# Altium PCB PCB-HC15C_REV1.PcbDoc (part 2 of 2)
Units mil, origin at the board's own origin, x right, y up, seen from the top; angles counter-clockwise.
Board outline 5600 x 4750 mil, 4 copper layers (Top Layer, InternalPlane1, InternalPlane2, Bottom Layer); 217 components, 162 nets, 705 pads, 241 vias.
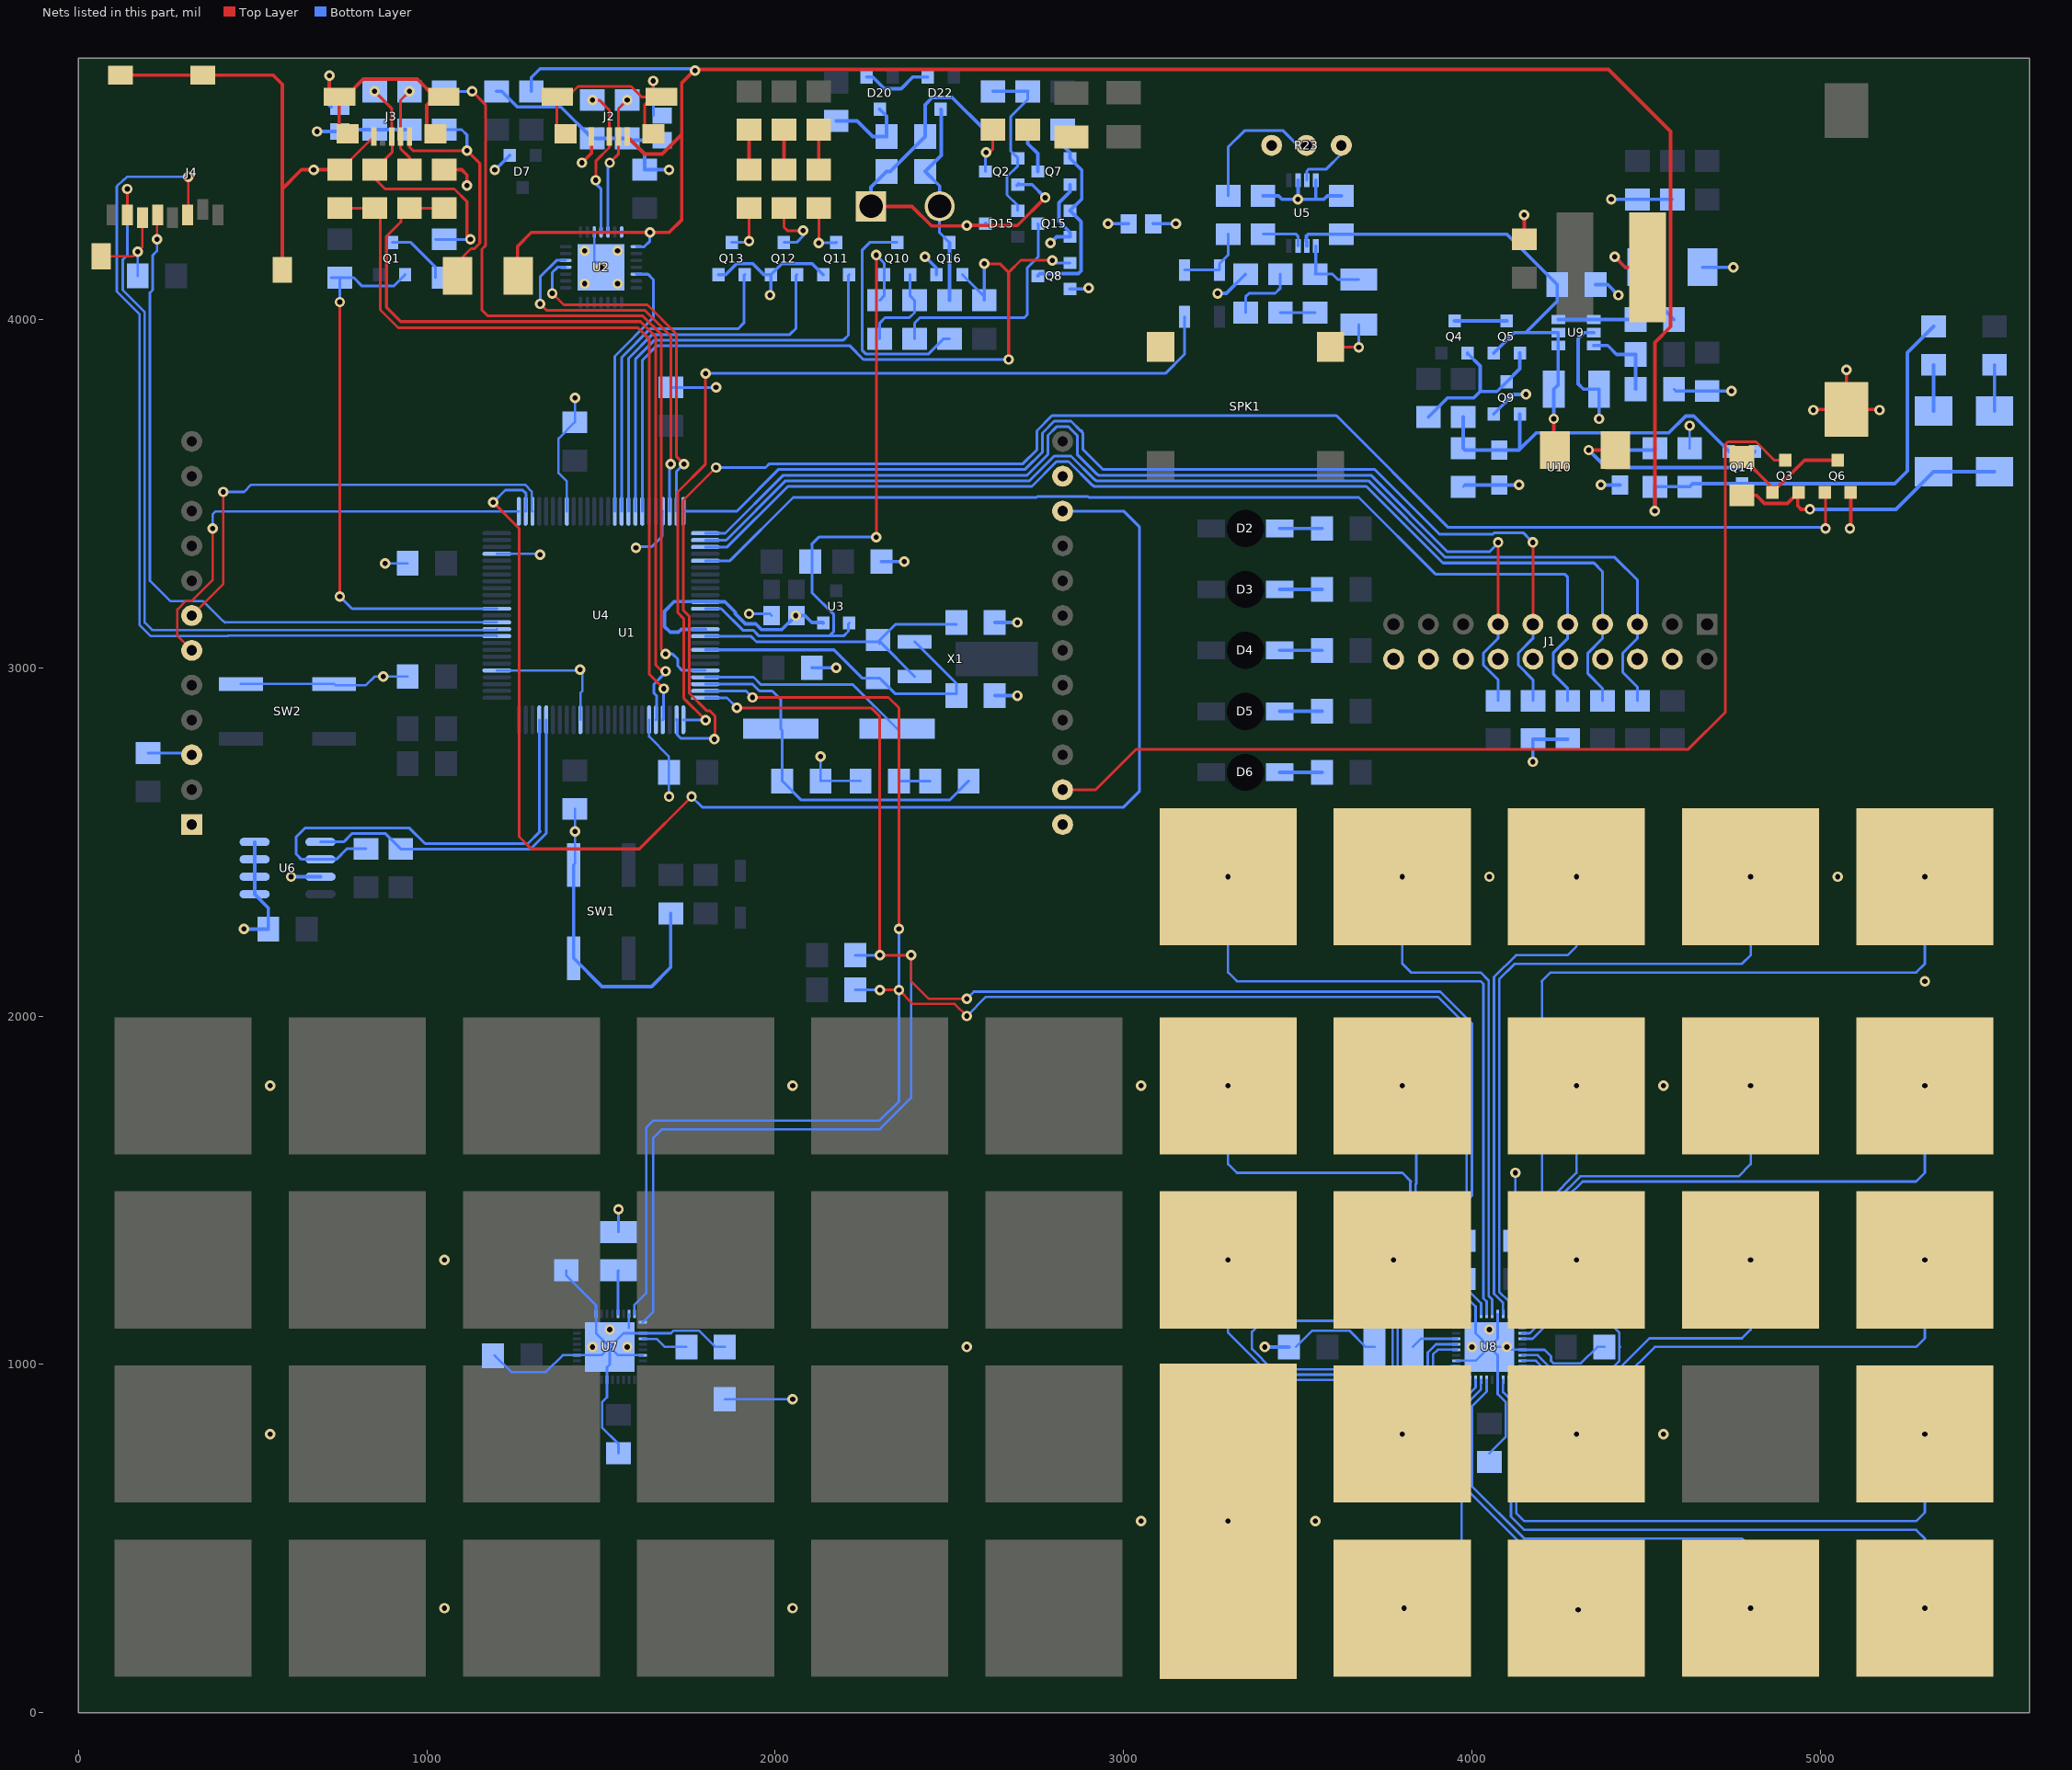
[diagram p4: the nets of this part, all layers, seen from the top]

## Via types
v1: diameter 30, hole 15, Top Layer to Bottom Layer, 230 vias
v2: diameter 30, hole 15, Top Layer to Bottom Layer, tented top, 11 vias

## Nets (pads, with @x,y where several pads share a name; then routed paths per layer and width w, separated by ;. In a path a pad name is that pad's centre, name@x,y a point inside that pad or via, vN(x,y) a via of type N, cw(c..) or ccw(c..) an arc to the next point about the centre after c; other vN are vias at no path point) (continued)
BCAP1: CS35.1 U8.2 | length 1809.5
  Bottom Layer w7: U8.2@4105.12,955.51 4105.12,925.62 4126.93,903.8 4126.93,573.07 4150,550 5275,550 5300,575 v1(5300,800)
BCAP2: CS47.1 U8.3 | length 1816
  Bottom Layer w7: U8.3@4089.37,955.51 4089.37,920.15 4111.93,897.59 4111.93,563.07 4150,525 5275,525 5300,500 v1(5300,300)
BCAP3: CS44.1 U8.8 | length 755.3
  Bottom Layer w7: v1(3805,300) 3830,300 3970,440 3970,893.15 4010.32,933.47 4010.32,955.2 U8.8@4010.63,955.51
BCAP4: CS32.1 U8.9 | length 310
  Bottom Layer w7: v1(3800,800) 3800,870.35 3825,895.35 3950.98,895.35 3994.57,938.94 3994.57,955.2 U8.9@3994.88,955.51
BCAP5: CS43.1 U8.10 | length 1074.9
  Bottom Layer w7: v1(3300,550) 3300,875 3380.51,955.51 3649.82,955.51 3694.98,910.35 3897.44,910.35 3942.61,955.51 U8.10@3979.13,955.51
BCAP6: CS19.1 U8.11 | length 955.2
  Bottom Layer w7: v1(3300,1300) 3300,1091.31 3420.8,970.51 3656.03,970.51 3701.2,925.35 3891.23,925.35 3945.01,979.13 U8.11@3955.51,979.13
BCAP7: CS20.1 U8.12 | length 1267.5
  Bottom Layer w7: v1(3775,1300) 3750,1275 3750,1150 3725,1125 3400,1125 3368.5,1093.5 3368.5,1044.02 3427.01,985.51 3662.25,985.51 3707.41,940.35 3885.02,940.35 3918.11,973.45 3918.11,973.75 3939.25,994.88 U8.12@3955.51,994.88
BCAP8: CS31.1 U8.28 | length 1451.8
  Bottom Layer w7: U8.28@4089.37,1144.49 4089.37,1176.11 4063.07,1202.41 4063.07,2111.93 4126.13,2175 4275,2175 4300,2200 v1(4300,2400)
BCAP9: CS36.1 U8.29 | length 1948.1
  Bottom Layer w7: U8.29@4105.12,1144.49 4105.12,1181.57 4078.07,1208.62 4078.07,2105.72 4122.35,2150 4775,2150 4800,2175 v1(4800,2400)
BCAP10: CS48.1 U8.31 | length 2374.1
  Bottom Layer w7: U8.31@4144.49,1120.87 4144.49,1181.18 4201.5,1238.19 4201.5,2098.5 4200,2100 4225,2125 5275,2125 5300,2150 v1(5300,2400)
BCAP11: CS9.1 U8.32 | length 768.8
  Bottom Layer w7: U8.32@4144.49,1105.12 4144.8,1105.43 4161.06,1105.43 4225,1169.37 4225,1475 4300,1550 v1(4300,1800)
BCAP12: CS10.1 U8.33 | length 1260.7
  Bottom Layer w7: U8.33@4144.49,1089.37 4166.22,1089.37 4250,1173.15 4250,1478.79 4311.21,1540 4765,1540 4800,1575 v1(4800,1800)
BCAP13: CS11.1 U8.34 | length 1783
  Bottom Layer w7: U8.34@4144.49,1073.62 4173.62,1073.62 4273.5,1173.5 4273.5,1481.07 4317.43,1525 5275,1525 5300,1550 v1(5300,1800)
BCAP14: CS23.1 U8.39 | length 1444.2
  Bottom Layer w7: U8.39@4144.49,994.88 4178.17,994.88 4214.98,958.07 4433.07,958.07 4525,1050 5275,1050 5300,1075 v1(5300,1300)
BCAP15: CS33.1 U8.40 | length 302.9
  Bottom Layer w7: U8.40@4144.49,979.13 4172.7,979.13 4208.77,943.07 4281.93,943.07 4300,925 v1(4300,800)
BCAP16: CS46.1 U8.6 | length 1370.4
  Bottom Layer w7: U8.6@4042.13,955.51 4042.13,921.58 4000,879.46 4000,650 4150,500 4775,500 4800,475 v1(4800,300)
BCAP17: CS45.1 U8.7 | length 810.2
  Bottom Layer w7: U8.7@4026.38,955.51 4026.07,955.2 4026.07,928.01 3985,886.94 3985,640 4305,320 v1(4305,295)
BCAP18: CS7.1 U8.15 | length 1576.1
  Bottom Layer w7: v1(3300,1800) 3300,1575 3325,1550 3800,1550 3825,1525 3823.07,1523.07 3823.07,1198.07 3772.12,1147.12 3772.12,985.87 3787.65,970.35 3872.59,970.35 3888.11,985.87 3888.11,1028.3 3901.94,1042.13 U8.15@3955.51,1042.13
BCAP19: CS8.1 U8.16 | length 1072.5
  Bottom Layer w7: v1(3800,1800) 3840,1760 3840,1518.79 3838.07,1516.85 3838.07,1188.07 3787.12,1137.12 3787.12,992.09 3793.86,985.35 3866.38,985.35 3873.11,992.09 3873.11,1034.51 3896.47,1057.87 U8.16@3955.51,1057.87
BCAP20: CS12.1 U8.25 | length 1973
  Bottom Layer w7: v1(3300,2400) 3300,2125 3325,2100 4025,2100 4033.07,2091.93 4033.07,1189.98 4042.13,1180.92 U8.25@4042.13,1144.49
BCAP21: CS24.1 U8.26 | length 1479.5
  Bottom Layer w7: v1(3800,2400) 3800,2150 3825,2125 4025,2125 4048.07,2101.93 4048.07,1196.2 4057.87,1186.39 U8.26@4057.87,1144.49
BCAP22: CS21.1 U8.37 | length 646.3
  Bottom Layer w7: U8.37@4144.49,1026.38 4189.1,1026.38 4227.41,988.07 4401.38,988.07 4423.11,1009.8 4423.11,1048.11 4425,1050 4423.11,1051.89 4423.11,1090.2 4300,1213.31 v1(4300,1300)
BCAP23: CS22.1 U8.38 | length 923.6
  Bottom Layer w7: U8.38@4144.49,1010.63 4183.63,1010.63 4221.2,973.07 4407.59,973.07 4509.52,1075 4775,1075 4800,1100 v1(4800,1300)
GND: BAT1.2 C1.2 C2.2 C3.2 C4.2 C5.2 C6.2 C7.2 C14.2 C15.2 C16.2 C17.2 C18.2 C19.2 C20.2 C21.2 C22.2 C23.2 C24.2 C25.2 C26.2 C27.2 C28.2 C29.2 C30.2 C31.2 C32.2 C33.2 C34.2 C35.2 C36.2 C38.2 C39.2 C40.2 C41.1 C42.2 C43.2 C46.2 D7.1 D8.1 D9.1 D11.1 D12.1 D18.1 FB1.1 FB3.1 FB4.1 FB5.1 J1.4 J1.6 J1.8 J1.10 J1.12 J1.14 J1.16 J1.18 J1.20 J2.5 J3.5 J4.6 J4.9 J4.10 J4.11 J4.12 Q6.2 Q9.2 R4.1 R6.1 R13.1 R39.1 R46.1 SW1.1 SW1.4 SW2.1 SW2.4 U1.1 U1.14 U1.24 U2.3 U2.29 U4.31 U4.41 U4.55 U4.72 U4.83 U4.97 U6.1 U6.2 U6.3 U6.4 U6.7 U7.4 U7.13 U7.19 U7.23 U7.27 U7.36 U7.41 U8.4 U8.13 U8.23 U8.27 U8.36 U8.41 U9.2 U10.2 U10.3 | length 12352.1
  Top Layer w7: J4.9@65.35,4181.89 156.89,4181.89 v1(170,4195) 183.46,4208.46 J4.6@183.46,4292.13 ; C2.2@750,4430.12 752.76,4430.12 J3.5@847.64,4525
  Top Layer w10: J4.10@120.47,4701.57 J4.11@356.69,4701.57 558.43,4701.57 585.04,4674.96 585.04,4375 ; J4.12@585.04,4142.52 585.04,4375 ; v1(675,4430) 640.04,4430 585.04,4375 ; v1@675,4430.12 C2.2@750,4430.12 ; C1.2@1050,4430.12 1099.88,4430.12 1115,4415 v1(1115,4385) ; v1(1445,4450) 1472.64,4477.64 J2.5@1472.64,4525 ; C39.2@4150,4230.12 v1(4150,4300) ; v1(4980,3740) 4981.73,3741.73 BAT1.2@5075,3741.73 ; v1(5075,3855) BAT1.2@5075,3741.73 ; v1(5085,3400) 5087.4,3402.4 Q6.2@5087.4,3503.74 ; v1(5170,3740) 5168.27,3741.73 BAT1.2@5075,3741.73
  Bottom Layer w7: C22.2@169.88,4125 169.88,4194.88 v1(170,4195) ; SW2.4@466.14,2953.74 SW2.1@733.86,2953.74 737.6,2950 825,2950 850,2975 C18.2@944.88,2975 ; v1(880,3300) C19.2@944.88,3300 ; C29.2@1194.88,1025 1241.82,978.07 1341.38,978.07 1389.69,1026.38 U7.4@1430.51,1026.38 1501.38,1026.38 U7.41@1525,1050 ; v1(1195,4430) 1200,4435 v1@1201.34,4435 ; U4.55@1200.79,2992.52 1437.52,2992.52 v1(1440,2995) 1446.5,2988.5 1446.5,2934.02 1440.94,2928.47 U4.41@1440.94,2850.79 ; U4.72@1200.79,3327.17 1322.83,3327.17 v1(1325,3325) ; C32.2@1400,1269.88 1400,1255.33 1485.32,1170.01 1485.32,1144.8 U7.13@1485.63,1144.49 1485.63,1089.37 U7.41@1525,1050 ; U4.83@1401.57,3449.21 1401.57,3535.12 1378.07,3558.62 1378.07,3658.18 C20.2@1425,3705.12 v1(1425,3775) ; SW1.1@1421.26,2433.86 1425,2437.6 C17.2@1425,2594.88 ; U2.3@1480.31,4251.38 1480.31,4169.69 v2(1500,4150) ; C30.2@1550,744.88 1550,771.93 1503.07,818.86 1503.07,891.38 1517.13,905.44 U7.36@1517.13,955.51 1517.13,992.13 1525,1000 U7.41@1525,1050 ; C27.2@1550,1380.12 v1(1550,1445) ; U7.41@1580.12,1105.12 U7.19@1580.12,1144.49 ; D8.1@1580.12,4519.88 D8.1@1575,4519.88 1580.31,4514.57 D8.1@1585.43,4514.57 ; U7.27@1619.49,1026.38 1548.62,1026.38 U7.41@1525,1050 ; U4.31@1637.8,2850.79 1637.8,2802.2 1694.88,2745.12 C16.2@1694.88,2700 1694.88,2640.12 1695,2640 v1(1695,2630) ; v1@1689.88,4430.12 1690,4430 v1(1695,4430) ; C31.2@1855.12,900 v1(2050,900) ; C25.2@1855.12,1050 1828.07,1050 1781.14,1096.93 1708.62,1096.93 1701.06,1089.37 U7.23@1619.49,1089.37 1564.37,1089.37 U7.41@1525,1050 ; v1(1925,3155) 1984.57,3155 FB3.1@1989.57,3150 ; v1(2130,2745) 2130,2675.12 C7.2@2130.12,2675 C6.2@2244.88,2675 ; v1(2695,2920) v1@2700,2920 ; C36.2@3494.88,1050 3541.82,1096.93 3648.11,1096.93 3695.05,1050 C28.2@3719.88,1050 ; U8.13@3955.51,1010.63 4010.63,1010.63 U8.41@4050,1050 ; C26.2@3975,1355.12 3970.12,1355.12 3928.07,1313.07 3928.07,1208.62 3934.8,1201.89 3974.96,1201.89 4010.63,1166.22 U8.23@4010.63,1144.49 4010.63,1089.37 U8.41@4050,1050 ; C41.1@3975,3519.88 C41.1@3980.12,3525 ; C33.2@4050,744.88 4096.93,791.82 4096.93,891.38 4073.62,914.69 U8.4@4073.62,955.51 4073.62,1026.38 U8.41@4050,1050 ; U8.27@4073.62,1144.49 4073.62,1073.62 U8.41@4050,1050 ; C35.2@4125,1355.12 v1(4125,1550) ; C34.2@4380.12,1050 4359.81,1050 4312.88,1003.07 4233.62,1003.07 4226.89,1009.8 4226.89,1023.11 4208.18,1041.82 4144.8,1041.82 U8.36@4144.49,1042.13 4107.87,1042.13 v2(4100,1050) U8.41@4050,1050 ; R46.1@4580.12,3800 R46.1@4585.24,3794.88 ; C46.2@4625,3630.12 v1(4625,3695)
  Bottom Layer w8: v1(1600,3345) 1603,3348 1645.63,3348 1675.39,3377.76 1675.39,3447.43 U4.97@1677.17,3449.21 ; C21.2@1700,3805.12 1829.88,3805.12 v1(1830,3805)
  Bottom Layer w10: v1(475,2250) C23.2@544.88,2250 544.88,2310.63 U6.1@505.51,2350 U6.4@505.51,2500 ; v1(610,2400) U6.7@694.49,2400 ; v1(685,4540) 685.43,4539.57 FB4.1@750,4539.57 755.31,4544.88 D11.1@950,4544.88 ; R13.1@1200,4655.12 1214.69,4655.12 1259.18,4610.62 1384.26,4610.62 D9.1@1475,4519.88 D8.1@1575,4519.88 ; v1@1201.34,4435 D7.1@1237.6,4471.26 ; SW1.1@1421.26,2433.86 SW1.4@1421.26,2166.14 1502.4,2085 1645,2085 1700,2140 C3.2@1700,2294.88 ; FB1.1@1675,4514.57 1585.43,4514.57 1625,4475 C24.2@1625,4430.12 v1@1689.88,4430.12 ; C15.2@2105.12,3000 v1(2175,3000) ; C14.2@2305.12,3305 v1(2370,3305) ; C5.2@2630.12,2920 v1@2700,2920 ; C4.2@2630.12,3130 v1(2695,3130) ; FB5.1@3085.43,4275 v1(3150,4275) ; v1(3405,1050) C36.2@3474.88,1050 ; C41.1@3980.12,3525 U10.3@4078.54,3525 v1@4140,3525 ; Q9.2@4062.6,3728.74 4118.86,3785 v1(4155,3785) ; v1(4175,2730) R6.1@4175,2794.88 R4.1@4275,2794.88 ; U9.2@4350,3962.6 4322.6,3962.6 4305,3945 4305,3815 4320,3800 C43.2@4364.96,3800 4364.96,3720.04 4365,3720 v1(4365,3715) ; C42.2@4355.12,4100 4390,4100 v1(4420,4070) ; v1(4370,3525) U10.2@4425,3525 ; v1(4400,4345) 4400.12,4344.88 C40.2@4475,4344.88 R39.1@4575,4344.88 ; R46.1@4585.24,3794.88 C38.2@4675,3794.88 4744.88,3794.88 v1(4745,3795) ; D18.1@4662.01,4150 v1(4750,4150)
  other v1: 1050,300 2050,300 3050,550 3550,550 550,800 4550,800 2550,1050 1050,1300 550,1800 2050,1800 3050,1800 4550,1800 5300,2100 4050,2400 5050,2400 1425,2530 875,2975 4135,3525
  other v2: 1475,1050 1575,1050 4000,1050 1525,1100 4050,1100 1452.76,4102.76 1547.24,4102.76 1452.76,4197.24 1547.24,4197.24
GNDA: C8.1 C12.2 C44.2 D21.1 FB3.2 FB5.2 Q7.2 Q8.2 Q11.2 Q12.2 Q13.2 Q15.2 Q16.2 R23.1 R28.1 SPK1.2 U3.2 U4.11 U4.15 U5.2 U5.4 | length 1981.1
  Top Layer w10: D21.1@2849.02,4525 D21.1@2850,4524.02
  Bottom Layer w10: U4.15@1799.21,3110.63 1730.23,3110.63 1721.6,3102 1698.4,3102 1682,3118.4 1682,3162 1710,3190 1798.58,3190 U4.11@1799.21,3189.37 1855.58,3189.37 1885,3159.95 1885,3155.4 1914.46,3125.94 1944.06,3125.94 1960.56,3109.44 2018.57,3109.44 v1(2059.13,3150) ; Q13.2@1837.6,4128.74 1857.6,4128.74 1889.3,4160.44 1935.5,4160.44 1967.2,4128.74 Q12.2@1987.6,4128.74 ; v1(1985,4070) 1985,4080 1987.6,4082.6 Q12.2@1987.6,4128.74 ; FB3.2@2060.43,3150 v1(2059.13,3150) ; U3.2@2137.6,3128.74 2136.34,3130 2105,3130 2085,3150 v1(2059.13,3150) ; Q11.2@2137.6,4128.74 2105.9,4160.44 2019.3,4160.44 Q12.2@1987.6,4128.74 ; v1(2430,4180) 2462.6,4147.4 Q16.2@2462.6,4128.74 ; v1(2790,4220) 2807.6,4237.6 Q15.2@2846.26,4237.6 2846.26,4249.98 2814.56,4281.69 2814.56,4335.5 2846.26,4367.2 Q7.2@2846.26,4387.6 ; Q8.2@2846.26,4087.6 2887.6,4087.6 2890,4090 v1(2900,4090) ; v1(2955,4275) 2965,4275 FB5.2@3014.57,4275 ; v1(3270,4075) 3294.88,4075 R28.1@3350,4130.12 ; C12.2@3400,4355.12 3400.12,4355 3445,4355 3455,4345 v1(3500,4345) ; U5.2@3500.59,4400 3500.59,4345.59 v1(3500,4345) ; U5.4@3551.77,4400 3551.77,4346.77 3550,4345 ; C8.1@3625,4355.12 3585.12,4355.12 3575,4345 3550,4345 ; v1(3500,4345) 3550,4345
MISO0: J4.7 U4.61 | length 2372.2
  Top Layer w7: v1(140,4375) 140,4300.16 J4.7@140.16,4300
  Bottom Layer w7: v1(140,4375) 140,4185.05 126.89,4171.93 126.89,4084.8 190,4021.69 190,3130 211.5,3108.5 1198.66,3108.5 U4.61@1200.79,3110.63
MISO1: U1.15 U4.77 | length 4045.7
  Top Layer w8: v1(1190,3475) 1265,3400 1265,2515 1300,2480 1610,2480 v1(1760,2630)
  Bottom Layer w7: U4.77@1281.19,3451.49 U4.77@1283.46,3449.21
  Bottom Layer w8: v1(1190,3475) 1225,3510 1275,3510 1285,3500 1285,3450.75 U4.77@1283.46,3449.21 ; v1(1760,2630) 1790,2600 3000,2600 3045,2645 3045,3405 3000,3450 U1.15@2825,3450
MOSI0: J4.3 U4.60 | length 2653.8
  Top Layer w7: J4.3@313.39,4300 315,4301.61 v1(315,4410)
  Bottom Layer w7: v1(315,4410) 140,4410 131.5,4401.5 129.02,4401.5 110,4382.48 110,4080.48 175,4015.48 175,3123.79 207.84,3090.94 307.25,3090.94 307.81,3091.5 354.44,3091.5 355,3090.94 429.02,3090.94 430.58,3092.5 1199.23,3092.5 U4.60@1200.79,3090.94
MOSI1: U1.6 U4.76 | length 1342.6
  Top Layer w7: U1.6@325,3050 283.5,3091.5 283.5,3167.19 307.81,3191.5 325.19,3191.5 385,3251.31 v1(385,3400)
  Bottom Layer w7: v1(385,3400) 385,3440 394.21,3449.21 1178.31,3449.21 1179.02,3448.5 1263.07,3448.5 U4.76@1263.78,3449.21
NetC4_1: C4.1 R21.1 U4.16 X1.1 | length 894.5
  Bottom Layer w8: U4.16@1799.21,3090.94 1929.56,3090.94 1946.06,3074.44 2295.44,3074.44 R21.1@2300,3069.88 ; X1.1@2400,2975 2300,3075 2300,3080.12 2344.88,3125 C4.1@2519.88,3125
NetC5_1: C5.1 R21.2 U4.18 X1.2 | length 972.8
  Bottom Layer w8: U4.18@1799.21,3051.57 2168.43,3051.57 2250,2970 2299.88,2970 2300,2969.88 2344.88,2925 2519.88,2925 2519.88,2955.12 X1.2@2400,3075
NetC6_1: C6.1 R22.1 U4.22 X2.1 | length 853.9
  Bottom Layer w8: U4.22@1799.21,2972.83 1937.98,2972.83 1959.24,2951.57 2223.43,2951.57 X2.1@2350,2825 2355.12,2819.88 C6.1@2355.12,2675 R22.1@2444.88,2675
NetC7_1: C7.1 R22.2 U4.23 X2.2 | length 1051.5
  Bottom Layer w8: U4.23@1799.21,2953.15 1935.03,2953.15 1954.62,2933.57 1991.43,2933.57 2015.35,2909.65 X2.2@2015.35,2825 2019.88,2820.47 C7.1@2019.88,2675 2074.88,2620 2500.12,2620 R22.2@2555.12,2675
NetC9_1: C9.1 D13.2 D14.2 | length 213.3
  Bottom Layer w8: D13.2@3175,4141.93 D14.2@3275,4141.93 3275,4160 3300,4185 C9.1@3300,4244.88
NetC9_2: C9.2 R23.2 | length 506.9
  Bottom Layer w8: C9.2@3300,4355.12 3300,4495 3347,4542 3458,4542 ; 3458,4542 3525,4475 3512.5,4487.5 3458,4542
NetC10_1: C10.1 SPK1.1 | length 146.5
  Top Layer w8: SPK1.1@3594.09,3921.26 3673.74,3921.26 v1(3675,3920)
  Bottom Layer w8: v1(3675,3920) C10.1@3675,3985.04
NetC10_2: C10.2 C11.1 U5.5 | length 212.9
  Bottom Layer w8: U5.5@3551.77,4211.02 3551.77,4131.89 C11.1@3550,4130.12 3599.88,4130.12 3615,4115 C10.2@3675,4114.96 C10.2@3675,4114.96
NetC11_2: C11.2 C13.1 | length 100
  Bottom Layer w8: C13.1@3450,4019.88 C11.2@3550,4019.88
NetC12_1: C12.1 U5.7 | length 131.3
  Bottom Layer w8: C12.1@3400,4244.88 3494.88,4244.88 3495,4245 3500.59,4239.41 U5.7@3500.59,4211.02
NetC13_2: C13.2 R28.2 | length 195.6
  Bottom Layer w8: R28.2@3350,4019.88 3350,4065 3360,4075 3435,4075 3450,4090 C13.2@3450,4130.12
NetC25_1: C25.1 U7.24 | length 135.2
  Bottom Layer w7: U7.24@1619.49,1073.62 1619.8,1073.31 1659.59,1073.31 1682.9,1050 C25.1@1744.88,1050
NetC26_1: C26.1 U8.24 | length 121.7
  Bottom Layer w7: C26.1@3975,1244.88 3975,1226.84 4026.38,1175.46 U8.24@4026.38,1144.49
NetC27_1: C27.1 U7.17 | length 126
  Bottom Layer w7: U7.17@1548.62,1144.49 1548.62,1268.5 C27.1@1550,1269.88
NetC28_1: C28.1 U8.17 | length 135.2
  Bottom Layer w7: C28.1@3830.12,1050 3853.74,1073.62 U8.17@3955.51,1073.62
NetC37_1: C37.1 U9.1 U9.6 | length 222.2
  Bottom Layer w10: U9.6@4247.64,4000 U9.1@4350,4000 C37.1@4469.88,4000
NetC37_2: C37.2 D18.2 L1.1 | length 385.3
  Top Layer w10: v1(4410,4180) 4440,4150 L1.1@4504.33,4150
  Bottom Layer w10: v1(4410,4180) 4440,4150 D18.2@4487.99,4150 4487.99,4092.13 C37.2@4580.12,4000
NetC41_2: C41.2 Q9.1 Q14.1 R43.1 U10.4 | length 1039
  Bottom Layer w10: R43.1@3975,3719.88 C41.2@3975,3630.12 3980.12,3625 U10.4@4078.54,3625 4135,3625 4137.4,3627.4 ; Q9.1@4137.4,3728.74 4137.4,3627.4 ; Q14.1@4737.6,3621.26 4737.6,3622 4636.6,3723 4613.4,3723 4565.02,3674.61 4184.61,3674.61 4137.4,3627.4
NetC45_1: C45.1 D15.3 J5.1 Q2.2 R34.1 R41.1 | length 1319.6
  Top Layer w10: J5.1@2275,4325 2392.22,4325 2448.53,4268.69 2548.69,4268.69 v1(2550,4270) 2695,4270 v1(2775,4350)
  Bottom Layer w10: J5.1@2275,4325 2275,4380.12 C45.1@2319.88,4425 2330.12,4425 R41.1@2430.12,4525 2430.12,4616.49 2451.07,4637.44 2507.72,4637.44 2600.28,4544.88 R34.1@2625,4544.88 ; v1(2550,4270) 2598.74,4270 D15.3@2603.74,4275 D15.3@2605,4276.26 ; Q2.2@2693.66,4385 Q2.2@2696.26,4387.6 ; Q2.2@2698.66,4390 Q2.2@2696.26,4387.6 ; v1(2775,4350) 2737.4,4387.6 Q2.2@2696.26,4387.6
NetC45_2: C45.2 D22.3 J5.2 Q16.3 R50.1 | length 597.5
  Bottom Layer w8: J5.2@2471.85,4325 2471.85,4249.41 Q16.3@2500,4221.26
  Bottom Layer w10: J5.2@2471.85,4325 2471.85,4383.27 C45.2@2430.12,4425 2476.61,4471.5 2476.61,4602.13 D22.3@2475,4603.74 ; R50.1@2500,4055.12 Q16.3@2500,4221.26
NetD1_1: D1.1 J3.1 R17.2 | length 723
  Top Layer w8: J3.1@950,4525 950,4495 960,4485 v1(1115,4485) 1152,4448 1152,4218.82 1136.18,4203 1126.18,4203 1095,4171.82 1095,4132.01 D1.1@1087.99,4125
  Bottom Layer w8: R17.2@1050,4544.88 1100.12,4544.88 1115,4530 v1(1115,4485)
NetD2_1: D2.1 R7.1 | length 121.5
  Bottom Layer w10: D2.1@3448.43,3400 R7.1@3569.88,3400
NetD3_1: D3.1 R8.1 | length 121.5
  Bottom Layer w10: D3.1@3448.43,3225 R8.1@3569.88,3225
NetD4_1: D4.1 R9.1 | length 121.5
  Bottom Layer w10: D4.1@3448.43,3050 R9.1@3569.88,3050
NetD5_1: D5.1 R10.1 | length 121.5
  Bottom Layer w10: D5.1@3448.43,2875 R10.1@3569.88,2875
NetD6_1: D6.1 R11.1 | length 121.5
  Bottom Layer w10: D6.1@3448.43,2700 R11.1@3569.88,2700
NetD11_2: D11.2 J3.2 R18.2 | length 246.1
  Top Layer w8: R18.2@950,4430.12 950,4465 924.41,4490.59 J3.2@924.41,4525 924.41,4629.41 v1(950,4655)
NetD12_2: D12.2 J3.3 R16.1 R19.2 | length 813
  Top Layer w8: R19.2@825,4430.12 837.5,4417.62 880.12,4375 1078.78,4375 1115,4338.78 1115,4230 v1(1125,4230) ; R19.2@850,4430.12 900,4480.12 900,4523.82 J3.3@898.82,4525 898.82,4606.18 v1(850,4655)
  Bottom Layer w8: R16.1@1025,4230.12 1025.12,4230 R16.1@1050,4230 ; R16.1@1050,4230.12 1050.12,4230 v1(1125,4230)
NetD15_1: D15.1 Q2.1 R34.2 R35.1 | length 497.2
  Bottom Layer w8: D15.1@2696.26,4312.4 2696.26,4327.18 2665.56,4357.88 2665.56,4410.29 2696.26,4440.99 Q2.1@2696.26,4462.4 2696.26,4463.94 2675.57,4484.64 2675.57,4582.18 2725,4631.61 R35.1@2725,4655.12
  Bottom Layer w10: R34.2@2625,4655.12 R35.1@2725,4655.12
NetD16_1: D16.1 R32.1 | length 132.9
  Bottom Layer w10: D16.1@5500,3737.01 R32.1@5500,3869.88
NetD16_2: D16.2 D17.2 Q3.2 R36.2 | length 842.3
  Top Layer w10: R36.2@4775,3494.88 4816.65,3494.88 4839.5,3472.04 4905.7,3472.04 Q3.2@4937.4,3503.74 ; Q3.2@4940,3501.14 Q3.2@4937.4,3503.74 ; v1(4970,3455) 4945,3455 4935,3465 4935,3501.34 Q3.2@4937.4,3503.74
  Bottom Layer w10: v1(4970,3455) 5217.01,3455 D17.2@5325,3562.99 D16.2@5500,3562.99
NetD17_1: D17.1 R38.2 | length 132.9
  Bottom Layer w10: D17.1@5325,3737.01 R38.2@5325,3869.88
NetD20_1: D20.1 D22.1 | length 202.9
  Bottom Layer w10: D20.1@2262.6,4696.26 2279.77,4696.26 2313.47,4662.56 2361.33,4662.56 2395.03,4696.26 D22.1@2437.6,4696.26
NetD20_3: D20.3 R41.2 R42.1 | length 250.5
  Bottom Layer w10: R42.1@2175,4569.88 2175.12,4570 2235,4570 2280,4525 R41.2@2319.88,4525 2319.88,4583.86 D20.3@2300,4603.74
NetD23_1: D23.1 Q14.2 | length 594.3
  Top Layer w10: v1(4335,3625) D23.1@4412.01,3625
  Bottom Layer w10: v1(4335,3625) 4385,3575 4766.14,3575 Q14.2@4812.4,3621.26
NetFB1_2: FB1.2 J2.6 J2.7 J2.8 J2.9 | length 1044.7
  Top Layer w8: v1(1650,4685) v1@1648.43,4683.43 ; J2.7@1349.21,4639.17 J2.7@1372.83,4615.55 ; J2.7@1349.21,4639.17 1404.02,4639.17 1433.85,4669 1586,4669 1615.83,4639.17 J2.6@1648.43,4639.17 ; J2.7@1349.21,4639.17 1361.71,4626.67 J2.7@1372.83,4615.55 ; J2.7@1372.83,4615.55 1372.83,4532.87 J2.7@1372.83,4615.55 ; 1624.8,4615.55 1624.8,4532.87 1624.8,4615.55 ; 1624.8,4615.55 J2.6@1648.43,4639.17 ; J2.6@1648.43,4639.17 v1@1648.43,4683.43 ; J2.6@1648.43,4639.17 v1@1648.43,4683.43
  Bottom Layer w8: FB1.2@1650,4585.43 v1(1650,4685) FB1.2@1650,4585.43
NetFB4_2: FB4.2 J3.6 J3.7 J3.8 J3.9 | length 926.5
  Top Layer w10: v1(720,4700) 720,4643.39 J3.7@724.21,4639.17 ; J3.7@724.21,4639.17 766.75,4639.17 817.57,4690 972.6,4690 1023.43,4639.17 999.8,4615.55 ; J3.7@724.21,4639.17 J3.7@747.83,4615.55 ; J3.7@724.21,4639.17 736.71,4626.67 J3.7@747.83,4615.55 ; J3.7@747.83,4615.55 747.83,4532.87 J3.7@747.83,4615.55 ; 999.8,4615.55 999.8,4532.87 999.8,4615.55
  Bottom Layer w10: v1(720,4700) 720,4615.43 FB4.2@725,4610.43
NetQ1_3: Q1.3 R16.2 | length 214.8
  Bottom Layer w8: Q1.3@900,4221.26 953.74,4221.26 R16.2@1025,4150 ; R16.2@1025,4150 1025,4119.88 R16.2@1025,4150
NetQ2_3: Q2.3 R31.1 | length 148.7
  Top Layer w8: v1(2605,4480) 2605,4470 2625,4490 R31.1@2625,4544.88
  Bottom Layer w8: Q2.3@2603.74,4425 2603.74,4468.74 2605,4470 v1(2605,4480)
NetQ3_1: Q3.1 Q6.3 R36.1 | length 363.4
  Top Layer w10: R36.1@4775,3605.12 4862.6,3517.52 Q3.1@4862.6,3503.74 4955.12,3596.26 Q6.3@5050,3596.26
NetQ4_1: Q4.1 Q5.1 Q9.3 R44.1 | length 492.6
  Bottom Layer w10: R44.1@3875,3719.88 3875,3720 3930,3775 4005.2,3775 4023.43,3793.24 ; Q4.1@3987.4,3900.91 Q4.1@3987.4,3903.03 ; Q4.1@3987.4,3903.74 Q4.1@3987.4,3903.03 ; Q5.1@4137.4,3903.74 4137.4,3858.66 Q9.3@4100,3821.26 4071.98,3793.24 4023.43,3793.24 ; Q4.1@3987.4,3903.03 4023.43,3867 4023.43,3793.24
NetQ4_3: Q4.3 Q5.3 | length 150
  Bottom Layer w10: Q4.3@3950,3996.26 Q5.3@4100,3996.26
NetQ7_1: Q7.1 Q8.3 Q15.1 R33.1 | length 585.6
  Bottom Layer w10: Q8.3@2753.74,4125 2760.43,4131.69 2870.35,4131.69 2877.96,4139.3 2877.96,4280.7 Q15.1@2846.26,4312.4 2880,4346.14 2880,4428.66 Q7.1@2846.26,4462.4 2846.26,4478.74 2825,4500 R33.1@2825,4544.88
NetQ7_3: Q7.3 R35.2 | length 131.8
  Bottom Layer w10: R35.2@2725,4544.88 2725,4505 2753.74,4476.26 Q7.3@2753.74,4425
NetQ10_1: Q10.1 R54.1 R55.2 | length 271.5
  Bottom Layer w8: R54.1@2300,3944.88 2300,3990 2315,4005 2385,4005 2400,4020 R55.2@2400,4055.12 2387.4,4067.72 Q10.1@2387.4,4128.74
NetQ10_3: Q10.3 R50.2 | length 669.8
  Bottom Layer w8: Q10.3@2350,4221.26 2271.26,4221.26 2250,4200 2250,3910.98 2259.6,3901.39 2440.4,3901.39 2483.9,3944.88 R50.2@2500,3944.88
NetQ11_3: Q11.3 R51.1 | length 150.4
  Top Layer w8: v1(2125,4220) R51.1@2125,4319.88
  Bottom Layer w8: v1(2125,4220) 2173.74,4220 Q11.3@2175,4221.26
NetQ12_3: Q12.3 R52.1 | length 191.8
  Top Layer w8: R52.1@2025,4319.88 2025,4265 2035,4255 v1(2080,4255)
  Bottom Layer w8: Q12.3@2025,4221.26 2061.26,4221.26 2080,4240 v1(2080,4255)
NetQ13_3: Q13.3 R53.1 | length 146.4
  Top Layer w8: v1(1925,4225) R53.1@1925,4319.88
  Bottom Layer w8: Q13.3@1875,4221.26 1921.26,4221.26 v1(1925,4225)
NetQ15_3: Q15.3 R55.1 | length 653.4
  Bottom Layer w8: R55.1@2400,3944.88 2400,3990 2415,4005 2715,4005 2723.04,4013.04 2723.04,4148.04 2755,4180 2755,4273.74 Q15.3@2753.74,4275
NetR23_3: R23.3 U5.3 | length 170.2
  Bottom Layer w8: U5.3@3526.18,4400 3526.18,4426.18 3532.08,4432.08 3582.08,4432.08 3625,4475 R23.3@3625,4500
NetR40_1: R40.1 R46.2 U9.3 | length 230.3
  Bottom Layer w10: U9.3@4350,3925.2 4389.8,3925.2 4415,3900 R40.1@4469.88,3900 R46.2@4469.88,3800
NetR45_2: R45.2 U10.1 | length 102.1
  Bottom Layer w10: U10.1@4425,3625 4519.88,3625 R45.2@4525,3630.12
NetR47_1: R47.1 R51.2 | length 114.8
  Top Layer w10: R51.2@2125,4430.12 R47.1@2125,4544.88
NetR48_1: R48.1 R52.2 | length 114.8
  Top Layer w10: R52.2@2025,4430.12 R48.1@2025,4544.88
NetR49_1: R49.1 R53.2 | length 114.8
  Top Layer w10: R53.2@1925,4430.12 R49.1@1925,4544.88
NetR57_2: R57.2 U1.3 | length 127.1
  Bottom Layer w8: R57.2@200,2755.12 319.88,2755.12 U1.3@325,2750
PWM_AUDIO: D13.1 U4.26 | length 2631.2
  Top Layer w8: v1(1800,2850) 1737,2913 1737,3141.18 1720,3158.18 1720,3505 1800,3585 v1(1800,3845)
  Bottom Layer w8: U4.26@1736.22,2850.79 v1@1799.21,2850.79 ; v1(1800,3845) 3120,3845 3175,3900 D13.1@3175,4008.07
  Bottom Layer w10: v1@1799.21,2850.79 v1(1800,2850)
PWM_BL: Q6.1 U4.27 | length 4540.9
  Top Layer w8: v1(1825,2795) 1827,2797 1827,2861.18 1811.18,2877 1803,2877 1753,2927 1753,3147.81 1736,3164.81 1736,3481 v1(1830,3575) v1@1827,3572 ; Q6.1@5012.6,3503.74 5015,3501.34 v1(5015,3400)
  Bottom Layer w8: U4.27@1716.54,2850.79 1718.31,2849.01 1718.31,2807.94 1728.8,2797.45 1822.55,2797.45 v1(1825,2795) ; v1(1830,3575) 1972.37,3575 1983.37,3586 2711,3586 2751,3626 2751,3680.65 2794.35,3724 3611,3724 3932,3403 5012,3403 v1(5015,3400)
  Bottom Layer w10: U4.27@1716.54,2850.79 U4.27@1717.31,2850.01
RNG_10: Q11.1 U4.93 | length 1251.4
  Bottom Layer w8: U4.93@1598.43,3449.21 1598.43,3885.54 1653.88,3941 2196,3941 2210,3955 2210,4126.34 Q11.1@2212.4,4128.74
RNG_20: Q12.1 U4.92 | length 1111.1
  Bottom Layer w8: U4.92@1578.74,3449.21 1578.74,3888.49 1647.25,3957 2042,3957 2060,3975 2060,4126.34 Q12.1@2062.4,4128.74
RNG_30: Q13.1 U4.91 | length 973.7
  Bottom Layer w8: U4.91@1559.06,3449.21 1559.06,3891.43 1640.63,3973 1893,3973 1910,3990 1910,4126.34 Q13.1@1912.4,4128.74
RTCK: J1.11 R6.2 U4.100 | length 3259.5
  Top Layer w8: J1.11@4175,3125 v1@4175,3370
  Bottom Layer w8: U4.100@1736.22,3449.21 1889.21,3449.21 2010,3570 2717.72,3570 2767,3619.28 2767,3674.02 2800.98,3708 2849.02,3708 2877.02,3680 2880,3680 2880,3677.02 2883,3674.02 2883,3627 2940,3570 3720,3570 3906,3384 4060.82,3384 4063.82,3387 4148,3387 4165,3370 4175,3370 v1(4175,3360) ; R6.2@4175,2905.12 4175,2965.6 4133,3007.6 4133,3042.4 4175,3084.4 J1.11@4175,3125
RXU0: U2.25 U4.99 | length 1036.8
  Top Layer w8: v1(1360,4075) 1393,4042 1633.25,4042 1716,3959.25 1716,3607.18 1738,3585.18 v1(1738,3585)
  Bottom Layer w8: v1(1360,4075) 1360,4135 1375,4150 U2.25@1398.62,4150 ; U4.99@1716.54,3449.21 1716.54,3563.35 1738,3584.82 v1(1738,3585)
SCL0: R26.1 U4.24 U7.20 U8.20 | length 5780.3
  Top Layer w7: v1(2355,2075) 2395,2035 2515,2035 v1(2550,2000)
  Top Layer w8: v1(1935,2915) 2325,2915 2355,2885 v1(2355,2250) ; v1(2300,2075) v1(2355,2075)
  Bottom Layer w7: U7.20@1595.87,1144.49 1595.87,1170.87 1629.65,1204.65 1629.65,1679.65 1650,1700 2300,1700 2355,1755 v1(2355,2250) ; v1(2550,2000) 2605,2055 3710,2055 3902.57,2055 3985,1972.57 3985,1490.74 3883.07,1388.8 3883.07,1189.98 3952.18,1120.87 U8.20@3955.51,1120.87
  Bottom Layer w8: U4.24@1799.21,2933.46 1916.54,2933.46 v1(1935,2915) ; R26.1@2230.12,2075 v1(2300,2075)
SCL1: R25.1 U4.47 U6.6 | length 1333.5
  Bottom Layer w8: R25.1@825,2480.12 770.12,2480.12 740,2450 U6.6@694.49,2450 640,2450 625,2465 625,2515 649.61,2539.61 950.39,2539.61 995,2495 1290,2495 1325,2530 1322.83,2532.17 U4.47@1322.83,2850.79
SDA0: R27.1 U4.25 U7.21 U8.21 | length 5796.4
  Top Layer w7: v1(2390,2175) 2390,2100 2440,2050 v1(2550,2050)
  Top Layer w8: v1(1890,2885) 2275,2885 2300,2860 v1(2300,2175) v1(2390,2175)
  Bottom Layer w7: U7.21@1619.49,1120.87 1650,1151.38 1650,1650 1675,1675 2300,1675 2390,1765 v1(2390,2175) ; v1(2550,2050) 2570,2070 3245,2070 3908.79,2070 4000,1978.79 4000,1484.52 3898.07,1382.59 3898.07,1196.2 3922.38,1171.89 3951.74,1171.89 U8.21@3979.13,1144.49
  Bottom Layer w8: U4.25@1799.21,2913.78 1861.22,2913.78 v1(1890,2885) v1@1900,2885 ; R27.1@2230.12,2175 v1(2300,2175)
SDA1: R24.1 U4.46 U6.5 | length 1021.2
  Bottom Layer w8: U6.5@694.49,2500 760.98,2500 784.6,2523.61 881.5,2523.61 R24.1@925,2480.12 926.12,2479 1296.63,2479 1342.52,2524.89 U4.46@1342.52,2850.79
SEL_V/C\: Q8.1 Q16.1 R56.1 U4.94 | length 2237.1
  Top Layer w8: v1(2600,4160) 2645,4160 2670,4135 ; v1(2670,3885) 2670,4135 ; v1(2795,4170) 2705,4170 2670,4135
  Bottom Layer w8: U4.94@1618.11,3449.21 1618.11,3882.6 1660.51,3925 2213.35,3925 2252.97,3885.39 2669.61,3885.39 v1(2670,3885) ; Q16.1@2537.4,4128.74 R56.1@2600,4066.14 ; R56.1@2600,4055.12 v1(2600,4160) ; v1(2795,4170) 2802.6,4162.4 Q8.1@2846.26,4162.4
SPICLK0: J4.5 U4.62 | length 2124.6
  Top Layer w7: v1(225,4230) 225,4298.23 J4.5@226.77,4300
  Bottom Layer w7: v1(225,4230) 225,4240 225,4196.21 212.88,4184.09 212.88,4084.8 205,4076.93 205,3250 263.5,3191.5 357.29,3191.5 413.79,3135 415,3135 420,3130 420.32,3130.32 U4.62@1200.79,3130.32
SPICLK1: U1.7 U4.78 | length 1352.5
  Top Layer w7: U1.7@325,3150 415,3240 v1(415,3505)
  Bottom Layer w7: v1(415,3505) 475,3505 495.5,3525.5 1281.42,3525.5 1300.87,3506.05 1300.87,3451.49 U4.78@1303.15,3449.21
TCK: J1.9 R4.2 U4.5 | length 3038
  Bottom Layer w8: U4.5@1799.21,3307.48 1869.93,3307.48 2051.45,3489 2749.86,3489 2752.86,3492 2898,3492 2901,3489 3675.02,3489 3895.02,3269 4266,3269 4275,3260 J1.9@4275,3125 4275,3084.4 4233,3042.4 4233,2983 4275,2941 R4.2@4275,2905.12
TDI: J1.5 R2.1 U4.2 | length 3304.9
  Bottom Layer w8: U4.2@1799.21,3366.54 1859.16,3366.54 2029.63,3537 2729.98,3537 2800.98,3608 2849.02,3608 2917.02,3540 2917.88,3540 2920.88,3537 3703.25,3537 3923.25,3317 4410,3317 4475,3252 J1.5@4475,3125 4475,3084.4 4433,3042.4 4433,2987 4475,2945 R2.1@4475,2905.12
TDO: J1.13 R5.1 U4.1 | length 3117.3
  Top Layer w8: J1.13@4075,3125 v1(4075,3360)
  Bottom Layer w8: U4.1@1799.21,3386.22 1856.22,3386.22 2023,3553 2723.35,3553 2783,3612.65 2783,3667.4 2807.6,3692 2842.4,3692 2867,3667.4 2867,3612.65 2923.65,3556 2924.51,3556 2927.51,3553 3709.88,3553 3929.88,3333 4050,3333 4075,3358 v1(4075,3360) ; R5.1@4075,2905.12 4075,2965.6 4033,3007.6 4033,3042.4 4075,3084.4 J1.13@4075,3125
TMS: J1.7 R3.1 U4.3 | length 3213.9
  Bottom Layer w8: U4.3@1799.21,3346.85 1862.1,3346.85 2036.25,3521 2736.6,3521 2807.6,3592 2842.4,3592 2910.4,3524 2911.25,3524 2914.25,3521 3696.63,3521 3916.63,3301 4350,3301 4375,3276 J1.7@4375,3125 4375,3084.4 4333,3042.4 4333,2983 4375,2941 R3.1@4375,2905.12
TXU0: U2.26 U4.98 | length 1088.7
  Top Layer w8: v1(1325,4045) 1344,4026 1626.63,4026 1700,3952.63 v1(1700,3585)
  Bottom Layer w8: v1(1325,4045) 1325,4122.63 1372.06,4169.69 U2.26@1398.62,4169.69 ; U4.98@1696.85,3449.21 1696.85,3581.85 v1(1700,3585)
USB_CONN: Q1.1 R15.1 U4.64 | length 1619.5
  Top Layer w8: v1(750,3205) v1(750,4050)
  Bottom Layer w8: R15.1@725,4119.88 R15.1@750,4119.88 ; v1(750,3205) 785.31,3169.69 U4.64@1200.79,3169.69 ; v1(750,4050) R15.1@750,4119.88 ; Q1.1@935,4126.34 Q1.1@937.4,4128.74 904.7,4096.04 814.08,4096.04 790.24,4119.88 R15.1@750,4119.88
USB_N: C1.1 R18.1 U4.30 | length 2362.9
  Top Layer w8: C1.1@1025,4319.88 R18.1@950,4319.88 925,4319.88 925,4280 884,4239 884,4035 925,3994 1613.37,3994 1657,3950.37 1657,3008 1685,2980 v1(1685,2990)
  Bottom Layer w8: U4.30@1657.48,2850.79 1659.26,2852.57 1659.26,2919.73 1651,2927.99 1651,2952.01 1678.99,2980 1685,2980 v1(1685,2990)
USB_P: C2.1 R19.1 U4.29 | length 2317.3
  Top Layer w8: C2.1@725,4319.88 R19.1@825,4319.88 ; R19.1@850,4319.88 866,4303.88 866,4239 866,4035 866,4027.54 917.54,3976 1605.92,3976 1639,3942.92 1639,2981 v1(1680,2940)
  Bottom Layer w8: U4.29@1677.17,2850.79 1678.94,2852.57 1678.94,2938.94 v1(1680,2940)
USB_S: U2.12 U4.90 | length 766.6
  Bottom Layer w8: U4.90@1539.37,3449.21 1539.37,3894.37 1650,4005 1650,4115 1635,4130 1601.69,4130 U2.12@1601.38,4130.31
USBD_N: D8.2 J2.2 U2.5 | length 402
  Top Layer w8: v1(1525,4450) 1549.41,4474.41 J2.2@1549.41,4525 1549.41,4604.41 v1(1575,4630)
  Bottom Layer w8: U2.5@1520,4251.69 U2.5@1519.69,4251.38 1519.69,4294.69 1520,4295 1520,4445 v1(1525,4450)
USBD_P: D9.2 J2.3 U2.4 | length 445.1
  Top Layer w8: v1(1475,4630) 1495,4630 1523.82,4601.18 J2.3@1523.82,4525 1523.82,4493.82 1485,4455 v1@1485,4402 ; v1(1485,4400) v1@1486,4401 ; v1@1486,4411 v1@1486,4401 ; v1@1485,4402 v1@1486,4401 ; v1@1485,4402 v1@1486,4401
  Bottom Layer w8: v1(1485,4400) 1485,4390 1499.24,4375.76 1499.24,4252.14 U2.4@1500,4251.38
VBL: Q3.3 U1.23 | length 2960.7
  Top Layer w8: U1.23@2825,2650 2920,2650 3035.15,2765.15 4620,2765.15 4727.57,2872.72 4727.57,3641.58 4734.6,3648.61 4815.4,3648.61 4867.76,3596.26 Q3.3@4900,3596.26
VBUS: R17.1 U4.21 | length 2339.5
  Top Layer w8: v1(1130,4655) 1168,4617 1168,4212.19 1158,4202.19 1158,4027 1175,4010 1620,4010 1673,3957 1673,3052 v1(1685,3040)
  Bottom Layer w8: R17.1@1050,4655.12 1050.12,4655 v1(1130,4655) ; v1(1685,3040) 1705,3040 1720,3025 1720,3005 1732.48,2992.52 U4.21@1799.21,2992.52
VCC: C8.2 C42.1 C43.1 D23.2 Q5.2 U5.6 U9.4 U9.5 | length 1569.5
  Top Layer w10: v1(4235,3715) 4235,3710 4235,3720 4235,3627.99 D23.2@4237.99,3625
  Bottom Layer w10: U5.6@3526.18,4211.02 3526.18,4223.82 3525,4225 3525,4240 3529.88,4244.88 C8.2@3625,4244.88 4100,4244.88 C42.1@4244.88,4100 4244.88,4052.48 4155,3962.6 ; Q5.2@4062.6,3903.74 4121.46,3962.6 4155,3962.6 ; v1(4235,3715) 4235,3710 4235,3720 4235.04,3720.04 C43.1@4235.04,3800 4247.64,3812.6 U9.4@4247.64,3925.2 U9.5@4247.64,3962.6 4155,3962.6
VREF30: Q10.2 R14.2 R54.2 U3.1 U4.12 | length 1916.6
  Top Layer w8: v1(2290,3375) v1(2290,4185)
  Bottom Layer w8: U4.12@1799.21,3169.69 1845.31,3169.69 1907.06,3107.94 1936.6,3107.94 1953.1,3091.44 2155.1,3091.44 ; U3.1@2212.4,3128.74 2210,3126.34 2210,3105 2196.44,3091.44 2155.1,3091.44 ; v1(2290,3375) 2125,3375 2105,3355 2105.12,3354.88 2105.12,3300 2105.12,3216.02 2168.31,3152.83 2168.31,3104.65 2155.1,3091.44 ; v1(2290,4185) 2312.6,4162.4 Q10.2@2312.6,4128.74 2312.6,4067.72 R54.2@2300,4055.12
VUSB: C46.1 D1.2 J2.1 Q14.3 R12.2 R38.1 R45.1 U2.7 U2.8 | length 7160.3
  Top Layer w10: D1.2@1262.01,4125 1260,4127.01 1260,4210 1300,4250 v1(1640,4250) 1695,4250 1731.7,4286.7 1731.7,4531.7 ; J2.1@1578,4522 J2.1@1575,4525 1625,4475 1675,4475 1731.7,4531.7 ; v1(4525,3450) 4525,3934.04 4570.48,3979.52 4570.48,4539.52 4392,4718 1770,4718 1731.7,4679.7 1731.7,4531.7
  Bottom Layer w8: U2.7@1560,4252.32 U2.7@1559.06,4251.38 1640,4251.38 v1(1640,4250) 1640,4225 1624.06,4209.06 U2.8@1601.38,4209.06
  Bottom Layer w10: R12.2@1300,4655.12 1300,4695 1325,4720 1765,4720 v1(1770,4715) ; v1(4525,3450) R45.1@4525,3519.88 C46.1@4625,3519.88 4633.86,3528.74 Q14.3@4775,3528.74 5213.74,3528.74 5250,3565 5250,3905.12 R38.1@5325,3980.12
pads on no net: D2.0 D3.0 D4.0 D5.0 D6.0 D7.2 D15.2 D20.2 D22.2 J1.15 J1.17 J1.19 J2.4 J3.4 J4.1 J4.8 SPK1.3 SPK1.4 U1.8 U1.9 U1.10 U1.11 U1.12 U1.13 U1.16 U1.17 U1.18 U1.19 U1.20 U1.21 U1.22 U2.1 U2.2 U2.10 U2.11 U2.13 U2.14 U2.15 U2.16 U2.17 U2.18 U2.19 U2.20 U2.21 U2.22 U2.23 U2.24 U2.27 U2.28 U3.3 U4.13 U4.20 U4.37 U4.38 U4.39 U4.40 U4.43 U4.44 U4.45 U4.48 U4.49 U4.50 U4.57 U4.58 U4.59 U4.65 U4.66 U4.67 U4.68 U4.69 U4.70 U4.73 U4.74 U4.75 U4.80 U4.81 U4.82 U4.85 U4.86 U4.87 U4.88 U4.89 U4.95 U5.1 U5.8 X1.3

## Polygon pours and split planes (outlines as drawn)
GND on Top Layer "Top Layer-No Net" (solid, pour order 1000): 50,50 5550,50 5550,2650 3050,2650 3050,2050 50,2050
GNDA on Top Layer "Top Layer-No Net" (solid, pour order 1000): 1775,4725 3750,4725 3750,3800 2300,3800 2300,3050 1750,3050 1750,3250 1850,3250 1850,4000 1775,4000
GND on InternalPlane1 (split plane): 5579.9,20.1 20.1,20.1 20.1,4729.9 5579.9,4729.9
3.3V on InternalPlane2 (split plane): 5579.9,20.1 20.1,20.1 20.1,4729.9 5579.9,4729.9

## Other copper
Top Layer:
  text "TOP" at 6500,1150 h100
Bottom Layer:
  text "BOTTOM" at 6500,700 h100
InternalPlane1 (plane layer: these items are gaps in the copper):
  text "PLANE 1 GND" at 6500,1000 h100
InternalPlane2 (plane layer: these items are gaps in the copper):
  text "PLANE 2 3.3V" at 6500,850 h100

## Silkscreen, mask and mechanical layers (free items; w line width, h text height)
Top Overlay:
  drawing of 1430 lines, arcs and shapes, not listed
  text "hc 15C" at 5175,4650 h130
  text "USB" at 1410,4400 h120
  text "USB:S" at 1220,4320 h120 r90
  text "VOLUME" at 3320,4300 h120
  text "+" at 2230,4100 h120
  text "-" at 2450,4080 h100
  text "SD MEM" at 30,4040 h120
  text "METER" at 2190,4030 h120
  text "USB" at 3090,3370 h100
  text "MEM" at 3080,3190 h100
  text "MET" at 3090,3020 h100
  text "HEX" at 3090,2840 h100
  text "JTAG" at 4100,2800 h120
  text "RAD" at 3090,2670 h100
  text "TOP SILK" at 6500,1450 h100
Bottom Overlay:
  circle w10: c300,300 r250
  circle w10: c300,4450 r250
  circle w10: c5300,4450 r250
  circle w10: c5300,300 r250
  lines w7: 2012,4701.99 2040.01,4730 2300,4730 ; 2090,3185 2105,3200 2105,3250 2298.35,3250 2341.37,3206.99 ; 2625,4695 2625,4735 3045,4735 3045,4675 ; 2725,4700 2725,4715 2975,4715 2975,4675 ; 3901.99,3658.63 3928.35,3685 3935,3685 ; 4525,3935 4545,3955 4625,3955 ; 4800,1550 5500,1550 ; 4800,2050 5500,2050 ; 4875,675 5275,1075 ; 4875,1075 5275,1075 ; 4950,1400 4950,2500 ; 5125,1440 5125,1510 ; 5225,920 5225,985 ; 5275,675 5275,1075 ; 4800,1400 4800,2500 5500,2500 5500,1400 4800,1400
  lines w10: 4850,2750 4850,2700 5450,2700 5450,2750 ; 4850,3050 4850,3000 5450,3000 5450,3050 ; 5132.48,932.48 ccw(c5275,1075) 5275,873.44 ; 50,50 50,550 550,550 550,50 50,50 ; 50,4200 50,4700 550,4700 550,4200 50,4200 ; 4800,2750 5500,2750 5500,2950 4800,2950 4800,2750 ; 4800,3050 4800,3250 5500,3250 5500,3050 4800,3050 ; 5050,50 5550,50 5550,550 5050,550 5050,50 ; 5050,4200 5050,4700 5550,4700 5550,4200 5050,4200
  text "BOOT" at 760,2650 h120
  text "2X 20mm" at 5300,2600 h100
  text "f(x)       X      Y" at 4900,2450 h100 r90
  text "P to R     x      y" at 5050,2450 h100 r90
  text "R to P     R      O" at 5150,2450 h100 r90
  text "X <> Y     y      x" at 5250,2450 h100 r90
  text "Y % X" at 5350,2450 h100 r90
  text "%(y-x)" at 5450,2450 h100 r90
  text "RESET" at 1270,2110 h120 r270
  text "(y/100)x" at 5350,2000 h80 r90
  text "100(y-x)/y" at 5450,2000 h80 r90
  text "METER SPECS:" at 1150,1800 h150
  text "SINGLE ENDED POSITIVE" at 1150,1700 h100
  text "MAX INPUT 30V" at 1150,1600 h100
  text "AUTO RANGING" at 1150,1500 h100
  text "z" at 5350,1500 h100 r90
  text "z" at 5450,1500 h100 r90
  text "ERROR: 2% +/-20mV" at 1150,1400 h100
  text "}=" at 5125,1375 h200 r90
  text "MIN MAX TRACK" at 1150,1300 h100
  text "4 DIGIT READ OUT" at 1150,1200 h100
  text "y" at 5100,1150 h100 r90
  text "CONTINUITY TO 100 ohm" at 1150,1100 h100
  text "O" at 5250,975 h100 r90
  text "R" at 5050,925 h100 r90
  text "x" at 5375,875 h100 r90
  text "BOTTOM SILK" at 6500,400 h100
  text "PCB-HC15C REV1" at 3575,50 h60
Top Solder:
  text "TOP SOLDER MASK" at 6500,1300 h100
Bottom Solder:
  text "BOTTOM SOLDER MASK" at 6500,550 h100
MFG:
  text "PCB FABRICATION NOTES:" at 8600,5500 h300
  text "MATERIAL:" at 8600,5100 h200
  text "FR4 (GF per MIL-P-13949) MIN UL 94V0" at 8800,4900 h200
  text "Cu WEIGHT:" at 8600,4600 h200
  text "OUTER LAYER: 1oz" at 8800,4400 h200
  text "INNER LAYER: STANDARD" at 8800,4200 h200
  text "SOLDER MASK:" at 8600,3900 h200
  text "TYPE: LPI (LQUID PHOTO-IMAGE)" at 8800,3700 h200
  text "COVER: SMOBC (SOLDER MASK OVER BARE Cu)" at 8800,3500 h200
  text "COLOR: GREEN" at 8800,3300 h200
  text "OVERALL PCB THICKNESS:" at 8600,3000 h200
  text "PCB: 62MIL" at 8800,2800 h200
  text "TOLERANCE: 7MIL" at 8800,2600 h200
  text "PCB ELECTRICAL TEST" at 8600,2300 h200
  text "TESTED TO GERBER DATA" at 8800,2100 h200
  text "PURCHASE ORDER TO OVERRIDE" at 8800,1900 h200
  text "HOLE DIAMETER TOLERANCE:" at 8600,1600 h200
  text "PLATED HOLE TOLERANCE: 3MIL" at 8800,1400 h200
  text "NON PLATED HOLE TOLERANCE: 3MIL" at 8800,1200 h200
  text "SILK SCREEN" at 8600,900 h200
  text "SIDES: TOP AND BOTTOM" at 8800,700 h200
  text "COLOR: WHITE" at 8800,500 h200
  text "ACCEPTABILITY:" at 8600,200 h200
  text "STANDARD: IPC-A-600 (LATEST REV)" at 8800,0 h200
  text "MFG TO ADD: DATE CODE, UL FLAME CODE" at 8800,-200 h200
BOARD OUTLINE:
  the board outline again, w10
TITLE BLOCK FILLIN:
  text "1" at 13600,-1250 h160
  text "MODEL: HC 15C" at 8600,-2025 h200
  text "PCB-HC15C" at 11900,-2200 h200
  text "1" at -2075,-2300 h100
  text "NA" at -1825,-2300 h100
  text "NA" at -1475,-2300 h100
  text "06/15/11" at 700,-2300 h60
  text "HSC" at 1175,-2300 h80
  text "HSC" at 1475,-2300 h80
  text "HSC" at 1775,-2300 h80
  text ".Pcb_File_Name_No_Path" at 9350,-2450 h100
TITLE BLOCK:
  drawing of 1525 lines, arcs and shapes, not listed
  text "J" at -2315,6985 h100
  text "I" at -2315,5985 h100
  text "H" at -2315,4985 h100
  text "G" at -2315,3985 h100
  text "F" at -2315,2985 h100
  text "E" at -2315,1985 h100
  text "D" at -2315,985 h100
  text "C" at -2315,-15 h100
  text "B" at -2315,-1015 h100
  text "SEE CDSEA00020 FOR MANUFACTURERS & DETAILED MATERIAL SPECS." at 8385,-1115 h100
  text "2 PLACE DECIMAL +/-0.01" at 11710,-1115 h100
  text "NEMA RATED FR4, .06S\", 1OZ CU X LAYERS, UL & CSA RECOGNIZED" at 8385,-1215 h100
  text "3 PLACE DECIMAL +/-0.005" at 11710,-1215 h100
  text "1:1" at 13135,-1265 h250
  text "PCB TO BE MARKE 94V-0 BY PCB VENDOR" at 8385,-1315 h100
  text "ANGLES +/-2 DEG" at 11710,-1315 h100
  text "MATERIAL DESCRIPTION AND FINISH" at 9210,-1440 h100
  text "TOLERANCE UNLESS NOTED" at 11735,-1440 h100
  text "SCALE" at 13110,-1440 h100
  text "REV" at 13535,-1440 h100
  text "TITLE:" at 8385,-1615 h200
  text "SHEET:" at 11735,-1665 h200
  text "OF:" at 12885,-1665 h200
  text "DRAWING NO:" at 11735,-1865 h200
  text "A" at -2315,-2015 h100
  text "INFORMATION HEREIN CONTAINED IS THE PROPERTY OF" at 6310,-2265 h75
  text "SYNERGY LIGHTING CONTROLS AND IS TO BE HELD IN" at 6310,-2340 h75
  text "SHEET:" at 13435,-2390 h100
  text "COMPLETE CONFIDENCE." at 6310,-2415 h75
  text "REV" at -2165,-2465 h75
  text "ECO" at -1815,-2465 h75
  text "ECO DESCRIPTION:" at -1465,-2465 h75
  text "DATE" at 785,-2465 h75
  text "DWR" at 1185,-2465 h75
  text "CHK" at 1485,-2465 h75
  text "APR" at 1785,-2465 h75
  text "REV" at 2085,-2465 h75
  text "ECO" at 2435,-2465 h75
  text "ECO DESCRIPTION:" at 2810,-2465 h75
  text "DATE" at 5035,-2465 h75
  text "DWR" at 5435,-2465 h75
  text "CHK" at 5735,-2465 h75
  text "APR" at 6035,-2465 h75
  text "FILENAME:" at 8385,-2465 h200
  text "FILETYPE: ALTIUM" at 11735,-2465 h200
  text "REPORDUCE WITH WRITTEN CONSENT ONLY." at 6285,-2490 h75
  text "B SIZE" at 13435,-2490 h100
  text "1" at -1715,-2615 h100
  text "2" at -715,-2615 h100
  text "3" at 285,-2615 h100
  text "4" at 1285,-2615 h100
  text "5" at 2285,-2615 h100
  text "6" at 3285,-2615 h100
  text "7" at 4285,-2615 h100
  text "8" at 5285,-2615 h100
  text "9" at 6285,-2615 h100
  text "10" at 7285,-2615 h100
  text "11" at 8285,-2615 h100
  text "12" at 9285,-2615 h100
  text "13" at 10285,-2615 h100
  text "14" at 11285,-2615 h100
  text "15" at 12285,-2615 h100
  text "16" at 13285,-2615 h100
Drill Drawing:
  text ".Legend" at -1900,5200 h100
  text "LAYER STACK" at -1900,800 h200
  text "TOP" at -1900,600 h200
  text "GND PLANE" at -1900,400 h200
  text "3.3V PLANE" at -1900,200 h200
  text "BOTTOM" at -1900,0 h200
  text "DRILL" at 6500,0 h100

## Dimensions
0,0 to 5600,0 on DIM
5600,0 to 5600,4750 on DIM

## Text inside footprints (layer, text, board x,y; h text height)
J1: Top Overlay "1" at 4675,3275 h40